# EAGLE board ESP32 (EAGLE 9.6.1)
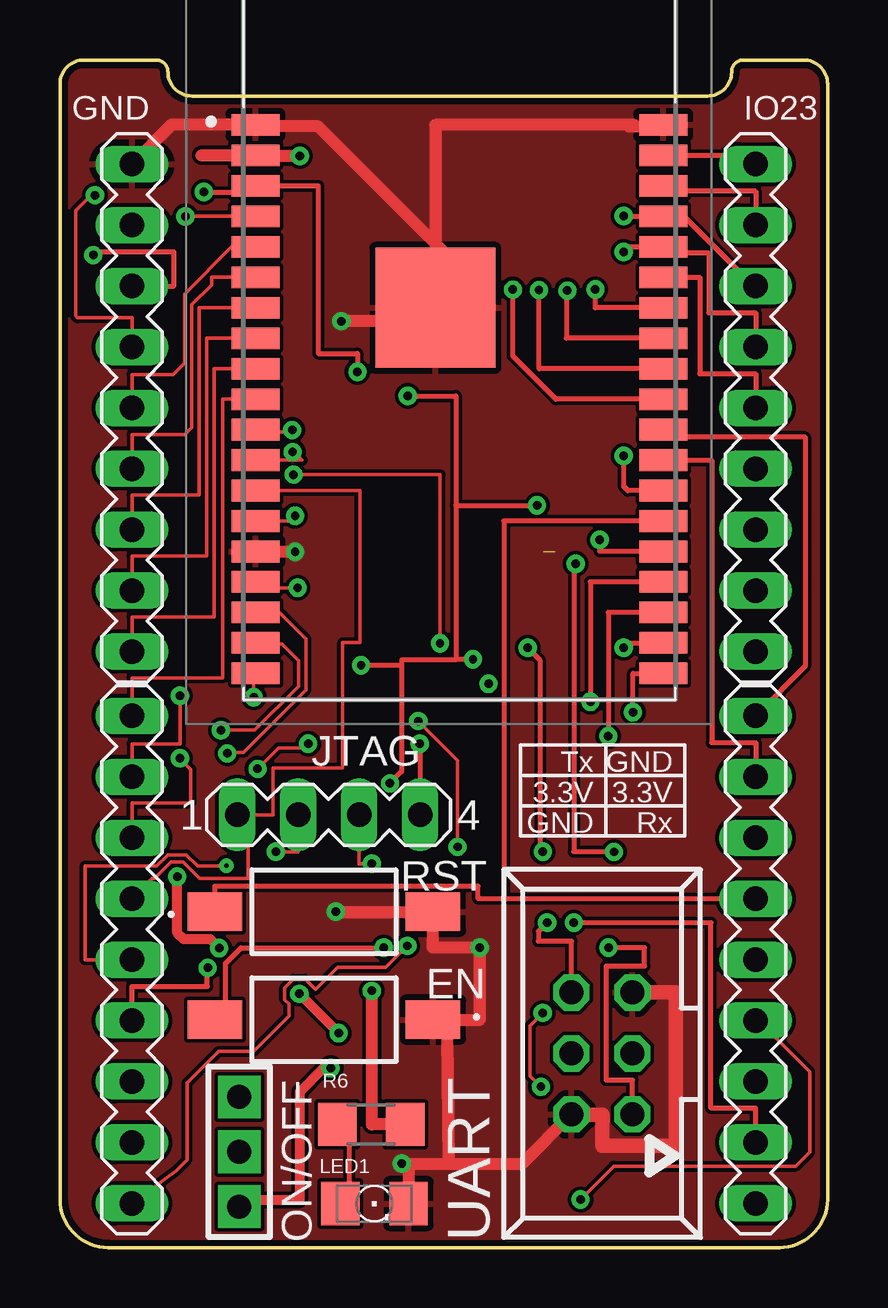
[diagram p0: board, top side]
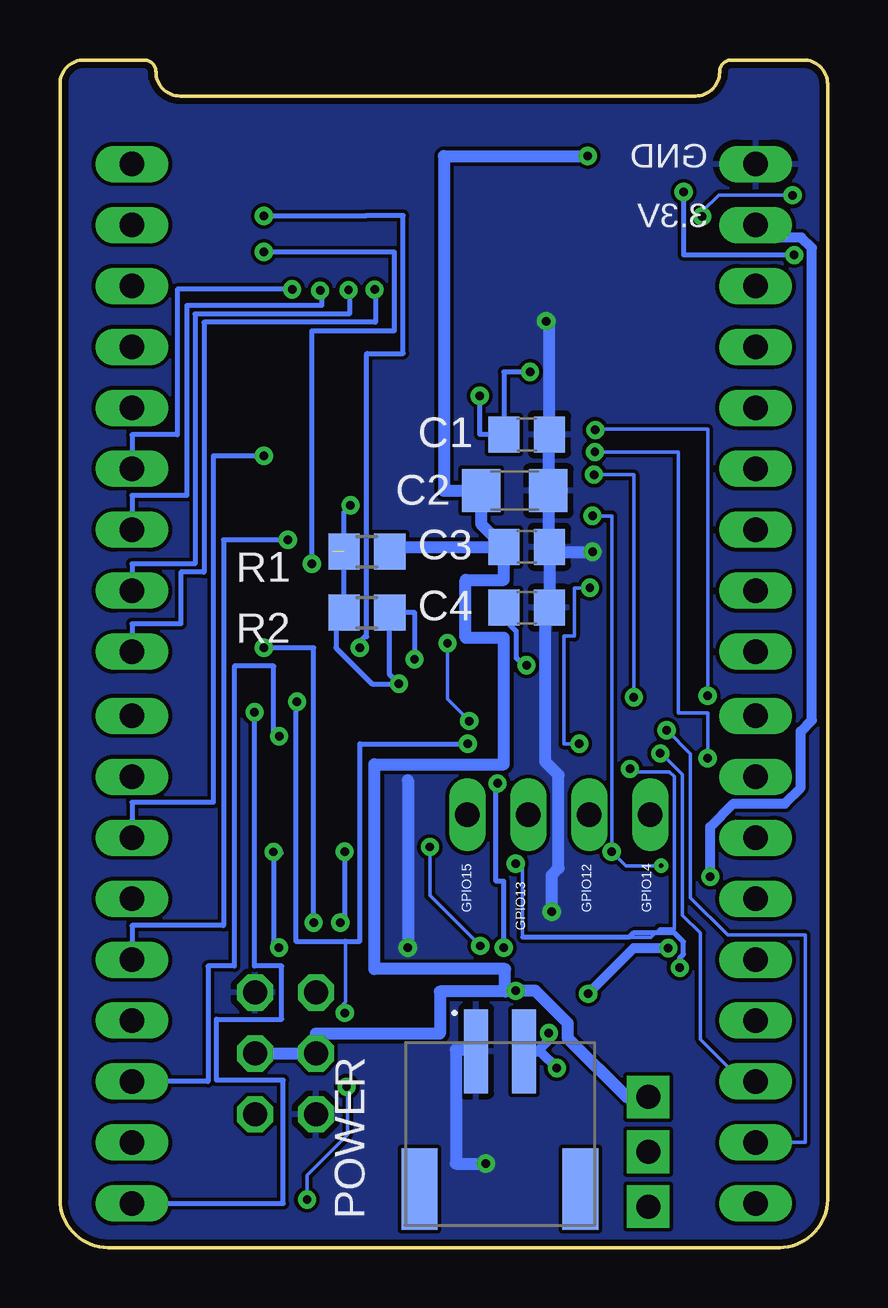
[diagram p1: board, bottom side, seen from below]

Size 32 x 49.5 mm. Coordinates in mm from the lower left corner, seen from the top.
Outline: 28.5,49.5 31,49.5 arc-90 32,48.5 32,2 arc-90 30,0 2,0 arc-90 0,2 0,48.5 arc-90 1,49.5 4,49.5 arc-90 4.5,49 arc90 5.5,48 27,48 arc90 28,49 arc-90 28.5,49.5
Copper layers (1*16): Top 0.035mm / dielectric 1.5mm / Bottom 0.035mm
Design rules "default *": minimum track width 6mil, minimum drill 0.2mm, track to track 6mil, track to pad 6mil, pad to pad 6mil, via to via 6mil, smd to smd 6mil, copper to edge 10mil, drill to drill 6mil, minimum pad ring 10mil, minimum via ring 8mil, stop-mask expansion 4mil, vias tented up to drill 0mil, thermal gap 10mil
Net classes: 1 other: width 0.2 mm, drill 0.2 mm, clearance 0.1 mm

## Footprints (pad centres in the part's own frame; a part is rotated, then mirrored left to right if it is on the bottom)
C0805 = smd 1.3 x 1.5: 1 -0.95,0; 2 0.95,0
C1206 = smd 1.6 x 1.8: 1 -1.4,0; 2 1.4,0
FSMSM = smd 2.27 x 1.6: 1 -4.55,0; 2 4.55,0
ESP32WROVERIB16MB = smd 2 x 0.9: 1 -7.85,8.26; 2 -7.85,6.99; 3 -7.85,5.72; 4 -7.85,4.45; 5 -7.85,3.18; 6 -7.85,1.91; 7 -7.85,0.64; 8 -7.85,-0.63; 9 -7.85,-1.9; 10 -7.85,-3.17; 11 -7.85,-4.44; 12 -7.85,-5.71; 13 -7.85,-6.98; 14 -7.85,-8.25; 15 -7.85,-9.52; 16 -7.85,-10.79; 17 -7.85,-12.06; 18 -7.85,-13.33; 19 -7.85,-14.6; 20 9.15,-14.6; 21 9.15,-13.33; 22 9.15,-12.06; 23 9.15,-10.79; 24 9.15,-9.52; 25 9.15,-8.25; 26 9.15,-6.98; 27 9.15,-5.71; 28 9.15,-4.44; 29 9.15,-3.17; 30 9.15,-1.9; 31 9.15,-0.63; 32 9.15,0.64; 33 9.15,1.91; 34 9.15,3.18; 35 9.15,4.45; 36 9.15,5.72; 37 9.15,6.99; 38 9.15,8.26 | smd 5 x 5: 39 -0.35,0.64
MA04-1 = drill 1.016 long: 1 -3.81,0; 2 -1.27,0; 3 1.27,0; 4 3.81,0
1206 = smd 1.6 x 1.803: A -1.422,0; C 1.422,0
CON3 = drill 1 pad 1.778 square: P$1 -2.794,0.254; P$2 -0.508,0.254; P$3 1.778,0.254
JST_S2B-PH-SM4-TB = smd 1 x 3.5: 1 1,0; 2 -1,0 | smd 1.5 x 3.4: P1 3.35,5.75; P2 -3.35,5.75
R0805 = smd 1.3 x 1.5: 1 -0.95,0; 2 0.95,0
R1206 = smd 1.6 x 1.803: 1 -1.422,0; 2 1.422,0
MA09-1 = drill 1.016 long: 1 -10.16,0; 2 -7.62,0; 3 -5.08,0; 4 -2.54,0; 5 0,0; 6 2.54,0; 7 5.08,0; 8 7.62,0; 9 10.16,0
057-006-1 = drill 1 octagon: 1 -2.54,-1.27; 2 -2.54,1.27; 3 0,-1.27; 4 0,1.27; 5 2.54,-1.27; 6 2.54,1.27

## Placement (x,y rotation side)
C1  1nF  [C0805]  12.54,33.89 0 bottom
C2  100uF  [C1206]  13.04,31.55 0 bottom
C3  1uF  [C0805]  12.54,29.21 0 bottom
C4  1nF  [C0805]  12.54,26.67 0 bottom
EN  FSMSMTR  [FSMSM]  11,9.5 180 top
IC6  ESP32-WROVER-B  [ESP32WROVERIB16MB]  16,38.53 0 top
JTAG  1  [MA04-1]  11.2,18.04 0 top
LED1  [1206]  13.11,1.83 0 top
ON/OFF  -CON3  [CON3]  7.22,3.48 270 top
POWER  S2B-PH-SM4-TB  [JST_S2B-PH-SM4-TB]  13.65,8.19 180 bottom
R1  12k  [R0805]  19.2,29.01 0 bottom
R2  460ohm  [R0805]  19.2,26.47 180 bottom
R6  1K  [R1206]  12.98,5.13 0 top
RST  FSMSMTR  [FSMSM]  11,14 0 top
SV1  [MA09-1]  29,12 270 top
SV2  [MA09-1]  29,35 270 top
SV5  [MA09-1]  3,35 90 top
SV6  [MA09-1]  3,12 90 top
UART  057-006-1  [057-006-1]  22.6,8.09 90 top

## Library data of the parts
C1-C4 = CommonParts; SPICEPREFIX: C
EN RST = FSMSMTR; ALLIED_NUMBER: 70286948; ALLIED_PRICE-STOCK: https://www.alliedelec.com/te-connectivity-fsmsmtr/70286948/; DESCRIPTION: Black Button Tact Switch, SPST 50 mA @ 24 V dc 1.07mm; HEIGHT: mm; MANUFACTURER_NAME: TE Connectivity; MANUFACTURER_PART_NUMBER: FSMSMTR; MOUSER_PART_NUMBER: 506-FSMSMTR; MOUSER_PRICE-STOCK: https://www.mouser.com/Search/Refine.aspx?Keyword=506-FSMSMTR; RS_PART_NUMBER: 1680547; RS_PRICE-STOCK: http://uk.rs-online.com/web/p/products/1680547
IC6 = ESP32-WROVER-B; DESCRIPTION: WiFi Modules (802.11) SMD Module, ESP32-D0WD, 64Mbits PSRAM, 32Mbits SPI flash, PCB Antenna; HEIGHT: mm; MANUFACTURER_NAME: Espressif Systems; MANUFACTURER_PART_NUMBER: ESP32-WROVER-B; MOUSER_PART_NUMBER: 356-ESP32-WROVER-B; MOUSER_PRICE-STOCK: https://www.mouser.com/Search/Refine.aspx?Keyword=356-ESP32-WROVER-B
JTAG = con-lstb; OC_FARNELL: unknown; OC_NEWARK: unknown
LED1 = led
ON/OFF = tango
POWER = S2B-PH-SM4-TB; AVAILABILITY: Unavailable; DESCRIPTION: Socket; wire-board; male; PIN: 2; 2mm; SMT; PH; 100V; 2A; -25÷85°C; MF: JST Sales; MP: S2B-PH-SM4-TB; PACKAGE: None; PRICE: None
R1 R2 = CommonParts
R6 = rcl; SPICEPREFIX: R
SV1 SV2 SV5 SV6 = CommonParts; OC_FARNELL: unknown; OC_NEWARK: unknown
UART = con-panduit; OC_FARNELL: unknown; OC_NEWARK: unknown

## Nets
3.3V: C2.1 C3.1 IC6.2 ON/OFF.P$1 R1.2 R6.2 UART.3 UART.4
3.3V_IN: ON/OFF.P$3 POWER.2 SV5.8
CLK: IC6.20 SV1.9
CMD: IC6.19 SV6.1
EN [other]: C1.1 C4.1 EN.2 IC6.3 R1.1 R2.1 R2.2 SV5.7
GND: C1.2 C2.2 C3.2 C4.2 EN.1 IC6.1 IC6.15 IC6.38 IC6.39 LED1.C POWER.1 RST.2 SV5.9 UART.2 UART.5
GPIO12: IC6.14 JTAG.2 SV6.5
GPIO13: IC6.16 JTAG.3 SV6.4
GPIO14: IC6.13 JTAG.1 SV6.6
GPIO15: IC6.23 JTAG.4 SV1.6
IO0 [other]: IC6.25 RST.1 SV1.4
IO2: IC6.24 SV1.5
IO4: IC6.26 SV1.3
IO5: IC6.29 SV2.9
IO18: IC6.30 SV2.8
IO19: IC6.31 SV2.7
IO21: IC6.33 SV2.5
IO22: IC6.36 SV2.2
IO23: IC6.37 SV2.1
IO25: IC6.10 SV6.9
IO26: IC6.11 SV6.8
IO27: IC6.12 SV6.7
IO32: IC6.8 SV5.2
IO33: IC6.9 SV5.1
IO34: IC6.6 SV5.4
IO35: IC6.7 SV5.3
N$14 [other]: LED1.A R6.1
NC_1: IC6.27 SV1.2
NC_2: IC6.28 SV1.1
NC_3: IC6.32 SV2.6
RXD0 [other]: IC6.34 SV2.4 UART.1
SD0: IC6.21 SV1.8
SD1: IC6.22 SV1.7
SD2: IC6.17 SV6.3
SD3: IC6.18 SV6.2
SEN_VN: IC6.5 SV5.5
SEN_VP: IC6.4 SV5.6
TXD0 [other]: IC6.35 SV2.3 UART.6

## Tracks (layer width: path | path; a pad name or v marks a point on that pad's centre or on a via)
3.3V  (via drill 0.35)
  Top 0.508: 5.9,45.52 IC6.2 8.15,45.5 v10,45.5 | R6.2 13,5.13 v13,10.7
  Bottom 0.508: 13.45,10.67 13.03,10.67 v13,10.7 12.18,10.7 10.84,9.36 10.84,8.73 8.37,6.27 ON/OFF.P$1 | 13.45,10.67 16.16,10.67 16.16,8.91 21.33,8.91 UART.4 UART.3 | 13.45,10.67 13.45,11.61 18.89,11.61 18.89,20.14 13.5,20.14 13.5,25.41 15.09,25.41 15.09,27.82 13.49,27.82 C3.1 | C3.1 18.05,29.21 R1.2 | v10,45.5 16,45.5 16,31.55 C2.1 14.44,30.16 C3.1
3.3V_IN  (via drill 0.35)
  Top 0.406: ON/OFF.P$3 7.78,2 10,2 10,6.5 10.98,7.48 v11.29,7.48 11.19,7.48 11.18,7.49 | v11.62,8.94 10.01,10.55 9.98,10.55 v9.98,10.58 | v6.64,12.48 6.28,12.84 5.17,12.84 4.89,13.12 v4.89,15.46
  Bottom 0.406: v11.29,7.48 11.99,8.19 POWER.2 12.09,8.19 11.58,8.7 11.58,8.9 v11.62,8.94 | v9.98,10.58 8.08,12.48 v6.64,12.48 | v4.89,15.46 4.89,17.53 3.92,18.5 1.77,18.5 1.12,19.16 1.12,21.52 0.66,21.98 0.66,41.67 1.08,42.1 2.48,42.1 SV5.8
CLK  (via drill 0.35)
  Top 0.2: v23.89,22.31 23.89,23.93 IC6.20
  Bottom 0.2: v23.89,22.31 23.89,11.73 22.76,11.73 22.76,9.52 25.48,9.52 25.48,6.98 22.69,6.98 22.69,1.84 SV1.9
CMD  (via drill 0.35)
  Top 0.152: v8.08,22.94 8.08,23.93 IC6.19 | v15.85,25.19 15.85,32.22 v9.74,32.22 | v14.94,21.95 16.58,20.3 v16.58,16.7 | v14.48,12.57 13.58,11.67 11.57,11.67 10.66,10.76 10.23,11.19 9.73,11.19 9.37,10.83 9.37,10.33 9.55,10.15 9.55,9.65 8.07,8.17 6.61,8.17 5.3,6.86 5.3,3.66 4.85,3.2 SV6.1
  Bottom 0.152: v8.08,22.94 8.08,32.22 v9.74,32.22 | v14.94,21.95 15.85,22.86 v15.85,25.19 | v16.58,16.7 16.58,14.67 v14.48,12.57
EN  (via drill 0.35)  (1 unrouted)
  Top 0.2: v12.4,36.5 12.4,37.27 10.77,37.27 10.77,44.25 IC6.3 8.15,44 v6,44 | v14.5,35.5 16.5,35.5 16.5,30.94 | 14.24,24.27 v12.55,24.27 | 16.5,30.94 16.5,24.52 | 16.5,24.52 16.5,24.5 14.24,24.5 14.24,24.27 | v17.22,24.52 16.5,24.52 | SV5.7 4.75,40.08 4.75,41.5 1.2,41.5 1.2,41.37 v1.39,41.37 | EN.2 6.9,9.95 6.9,11.85 7.55,12.5 v13.5,12.5 | v13.75,19.35 14.24,19.84 14.24,24.27 | 16.5,30.94 v19.89,30.94 | v17.87,23.5 18,23.63
  Bottom 0.2: v12.4,36.5 13.49,36.5 C1.1 14.5,33.89 v14.5,35.5 | C4.1 13.49,26.21 12.99,25.7 12.99,24.59 12.77,24.37 12.65,24.37 v12.55,24.27 | v17.22,24.52 17.22,26.49 18.23,26.49 R2.1 18.25,23.89 v17.87,23.5 19,23.5 20.5,25 20.5,26.12 R2.2 R1.1 20.15,30.67 v19.89,30.94 | v1.39,41.37 6,41.37 v6,44 | v13.5,12.5 13.5,15.27 13.82,15.27 13.82,19.35 v13.75,19.35 | 20.64,29.01 20.69,28.96
GND  (via drill 0.35)
  Top 0.152: 25.19,46.74 IC6.38 | 8.88,46.74 8.88,46.78 IC6.1 | 15.62,38.61 15.65,38.64 IC6.39 15.65,40.85 16.15,41.35
  Top 0.508: LED1.C 14.53,3.22 v14.25,3.5 16.23,3.5 | 16.23,3.5 19.28,3.5 UART.2 | 23.72,46.74 24,46.74 | 24,46.74 25.19,46.74 | 25.65,46.74 | 16.15,41.35 10.76,46.74 8.88,46.74 8.65,46.74 | IC6.1 4.63,46.79 SV5.9 | 16.38,38.61 15.62,38.61 v11.73,38.61 | v9.8,29 IC6.15 | 16.23,3.5 16.16,8.89 EN.1 17.5,9.5 v17.5,12.5 15.55,12.5 RST.2 v11.5,14 | 24,46.74 23.94,46.8 15.65,46.8 IC6.39
  Top 0.61: UART.2 21.35,5.53 22.61,5.53 22.61,4.23 25.68,4.23 25.68,10.63 UART.5
  Bottom 0.508: POWER.1 14.72,8.25 15.5,8.25 15.5,3.5 v14.25,3.5 | C3.2 C4.2 11.77,26.49 11.77,20.25 11.21,19.69 11.21,15.82 11.5,15.53 v11.5,14 11.52,14.02 | C3.2 11.59,29 v9.8,29 | v11.73,38.61 11.59,38.61 C1.2 11.64,33.84 C2.2 11.64,29.26 C3.2 | 17.5,19.48 v17.5,12.5
  pour Top: 0,0 0,48.5 arc-90 1,49.5 32,49.5 32,0
  pour Bottom: 0,0 0,48.5 arc-90 1,49.5 32,49.5 32,0
GPIO12  (via drill 0.2, 0.35)
  Top 0.152: JTAG.2 9.93,16.5 v9,16.5 | 8.3,30.28 9,30.28 9.58,30.28 v9.8,30.5 9.97,30.45 | SV6.5 1.05,12 1.05,15.9 4.04,15.9 4.51,16.37 5.27,16.37 5.74,15.9 6.8,15.9 6.94,15.76 v6.94,15.91
  Top 0.2: IC6.14 9,30.28
  Bottom 0.152: v9.8,30.5 9,30.5 v9,16.5 8.41,15.91 v6.94,15.91
GPIO13  (via drill 0.35)
  Top 0.152: IC6.16 8.15,27.5 v9.91,27.5 | v10.35,21 10.35,20.83 9.11,20.83 v8.23,19.95 | v13,16 12.47,16 JTAG.3
  Top 0.2: SV6.4 3,10.88 6.14,10.88 6.14,11.66 v6.16,11.66
  Bottom 0.152: v10.35,21 11,21 11,25.49 10.55,25.49 10.55,27.5 v9.91,27.5 | v13,16 12.71,16 12.71,12.93 7.36,12.93 7,13.29 6.39,13.29 6.39,19.63 6.59,19.83 8.12,19.83 v8.23,19.95
  Bottom 0.2: v6.16,11.66 6.16,12.07 6.01,12.22 6.01,12.74 6.38,13.11 8.09,13.11 8.27,12.93 12.71,12.93
GPIO14
  Top 0.152: SV6.6 3.84,15.38 3.95,15.38 4.64,16.07 5.14,16.07 5.83,15.38 7.85,15.38 7.85,17.58 JTAG.1 8.88,18.04 8.88,19.99 11.79,19.99 11.79,25.21 12.5,25.21 12.5,31.55 IC6.13
GPIO15  (via drill 0.35)
  Top 0.152: v20.12,9.78 19.6,9.25 19.6,7.15 v20.05,6.7 | v21.7,2 23.09,3.39 30.67,3.39 31.25,3.97 31.25,7.33 29.12,9.46 SV1.6
  Top 0.2: IC6.23 22.11,27.74 v22.11,22.76 v22.12,22.75 | v15,21 15.01,21 JTAG.4
  Bottom 0.152: 20.1,12.77 20.1,10.25 20.35,10 v20.12,9.78 | v21.7,2 21.7,3 20.02,4.69 20.02,6.67 v20.05,6.7
  Bottom 0.2: v22.12,22.75 22.17,22.75 22.17,12.77 20.1,12.77 19.5,12.77 19.5,21 v15,21
IO0
  Top 0.2: SV1.4 18.5,14.54 | 18.5,14.54 17.44,14.54 17.44,15.05 6.45,15.05 RST.1 | IC6.25 18.5,30.28 18.5,14.54
IO2  (via drill 0.35)
  Top 0.2: IC6.24 22.5,29.01 v22.5,29.5
  Bottom 0.2: v22.5,29.5 25.18,29.5 25.18,13.42 29,13.42 SV1.5
IO4  (via drill 0.35)
  Top 0.2: IC6.26 23.67,31.55 23.5,31.73 v23.5,33
  Bottom 0.2: v23.5,33 25.61,33 25.61,18.55 29,18.55 SV1.3
IO5  (via drill 0.35)
  Top 0.2: IC6.29 20.68,35.36 18.88,37.16 v18.88,39.93
  Bottom 0.2: v18.88,39.93 18.85,39.9 18.85,38.56 25.99,38.56 25.99,28.15 26.96,28.15 26.96,26 29,26 SV2.9
IO18  (via drill 0.35)
  Top 0.2: IC6.30 19.97,36.63 v19.97,39.91
  Bottom 0.2: v19.97,39.91 19.93,39.87 19.93,38.91 26.37,38.91 26.37,28.5 29,28.5 SV2.8
IO19  (via drill 0.35)
  Top 0.2: IC6.31 21.11,37.9 21.11,39.85 v21.15,39.89
  Bottom 0.2: v21.15,39.89 21.09,39.83 21.09,39.27 26.72,39.27 26.72,31.34 29,31.34 SV2.7
IO21
  Top 0.2: IC6.33 26.67,40.44 26.67,36.42 29,36.42 SV2.5
IO22
  Top 0.2: IC6.36 25.15,44.14 25.27,44.02 29,44.02 SV2.2
IO23
  Top 0.2: IC6.37 29,45.52 SV2.1
IO25
  Top 0.152: IC6.10 6.78,35.36 6.78,23.75 3,23.75 SV6.9
IO26  (via drill 0.35)
  Top 0.152: v5,23 5,21 3,21 SV6.8 | v9.68,34.08 9.77,33.99 9,33.99 8.65,33.99 | 8.15,33.99 IC6.11
  Top 0.2: IC6.11 8.25,33.99 9,33.99
  Bottom 0.152: v5,23 5,34.11 9.65,34.11 v9.68,34.08
IO27  (via drill 0.35)
  Top 0.152: SV6.7 3,18.53 5.46,18.53 5.46,19.94 v5,20.39 | v9.7,33.16 9.76,33.16 10.1,32.82 IC6.12
  Bottom 0.152: v5,20.39 5,22.29 6.21,22.29 6.21,33.16 v9.7,33.16
IO32
  Top 0.152: IC6.8 6.11,37.9 6.11,28.83 3,28.83 SV5.2
IO33
  Top 0.152: IC6.9 6.43,36.63 6.43,26.29 3,26.29 SV5.1
IO34
  Top 0.152: IC6.6 6.32,40.44 6.32,40.12 5.5,39.3 5.5,34.17 5.21,33.88 3,33.88 SV5.4
IO35
  Top 0.152: IC6.7 5.8,39.17 5.8,31.37 3,31.37 SV5.3
N$14
  Top 0.2: R6.1 12.08,4.56 12.08,1.98 11.7,1.84 LED1.A
NC_1
  Top 0.2: IC6.27 27.17,32.82 27.17,21.04 29,21.04 SV1.2
NC_2
  Top 0.2: IC6.28 25.47,33.77 31.07,33.77 31.07,24.23 SV1.1
NC_3  (via drill 0.35)
  Top 0.2: IC6.32 22.32,39.17 v22.32,39.94
  Bottom 0.2: v22.32,39.94 27.11,39.94 27.11,33.88 29,33.88 SV2.6
RXD0  (via drill 0.35)
  Top 0.2: SV2.4 29,38.96 27.05,38.96 27.05,41.44 25.42,41.44 IC6.34 23.5,41.71 v23.5,41.5 | v22.87,12.5 24.37,12.5 24.37,11.73 22.78,11.73 22.78,6.98 23.87,6.98 UART.1 | v21.5,28.5 21.42,28.42 21.42,16.49 v23.1,16.49
  Bottom 0.2: v22.87,12.5 23.1,12.73 v23.1,16.49 22.83,16.49 22.78,16.44 | v21.5,28.5 21.5,38.21 18.06,38.21 18.06,41.5 v23.5,41.5
SD0  (via drill 0.35)
  Top 0.2: SV1.8 29,5.8 27.14,5.8 27.14,13.54 v21.42,13.54 | v23.5,25 23.5,25.2 IC6.21
  Bottom 0.2: v21.42,13.54 21.42,25 v23.5,25
SD1  (via drill 0.35)
  Top 0.2: IC6.22 22.86,26.47 v22.86,21.31
  Bottom 0.2: SV1.7 25.83,6.92 25.83,11.73 24.73,11.73 24.73,24.23 23.09,24.23 23.09,21.31 v22.86,21.31
SD2  (via drill 0.35)
  Top 0.152: v6.98,20.6 7.02,20.64 7.65,20.64 10.25,23.24 10.25,25.38 9.19,26.44 8.15,26.44 IC6.17
  Bottom 0.152: v6.98,20.6 6.95,20.62 6.04,19.72 6.04,13.85 5.3,13.11 5.3,8.69 3.76,7.14 SV6.3
SD3  (via drill 0.35)
  Top 0.152: v6.71,21.57 8.12,21.57 9.95,23.39 9.95,24.46 9.26,25.15 8.15,25.15 IC6.18
  Bottom 0.152: v6.71,21.57 5.71,20.57 5.71,14.58 4.16,13.03 0.93,13.03 0.93,4.38 SV6.2
SEN_VN
  Top 0.152: SV5.5 3,36.39 4.72,36.39 5.19,36.86 5.19,39.74 7.16,41.71 IC6.5
SEN_VP  (via drill 0.35)
  Top 0.152: IC6.4 v5.23,42.98 5.03,42.98 | SV5.6 3,38.76 0.73,38.76 0.65,38.83 0.65,43.21 1.4,43.96 1.46,43.96 v1.46,43.86
  Bottom 0.152: v1.46,43.86 4.54,43.86 5.23,43.17 v5.23,42.98
TXD0  (via drill 0.35)
  Top 0.2: SV2.3 28.92,40.08 26.02,42.98 IC6.35 25.15,43 v23.5,43 | UART.6 21.33,12.77 19.95,12.77 19.95,13.18 v20.31,13.54 | v19.5,25 20,24.5 20,16.5 v20.13,16.5
  Bottom 0.2: v23.5,43 19.25,43 19.23,43.02 17.69,43.02 17.69,37.27 19.19,37.27 19.21,37.25 19.21,25.46 19.25,25.46 19.25,25.5 19.5,25.25 v19.5,25 | v20.13,16.5 20.13,13.72 v20.31,13.54

## Text on the board
tNames: GND | IO23 | Tx | GND | 3.3V | 3.3V | GND | Rx | ON/OFF
bNames: GND | 3.3V | GPIO14 | GPIO12 | GPIO15 | GPIO13